# EAGLE board amc6821-breakout-v2.3 (EAGLE 9.6.2)
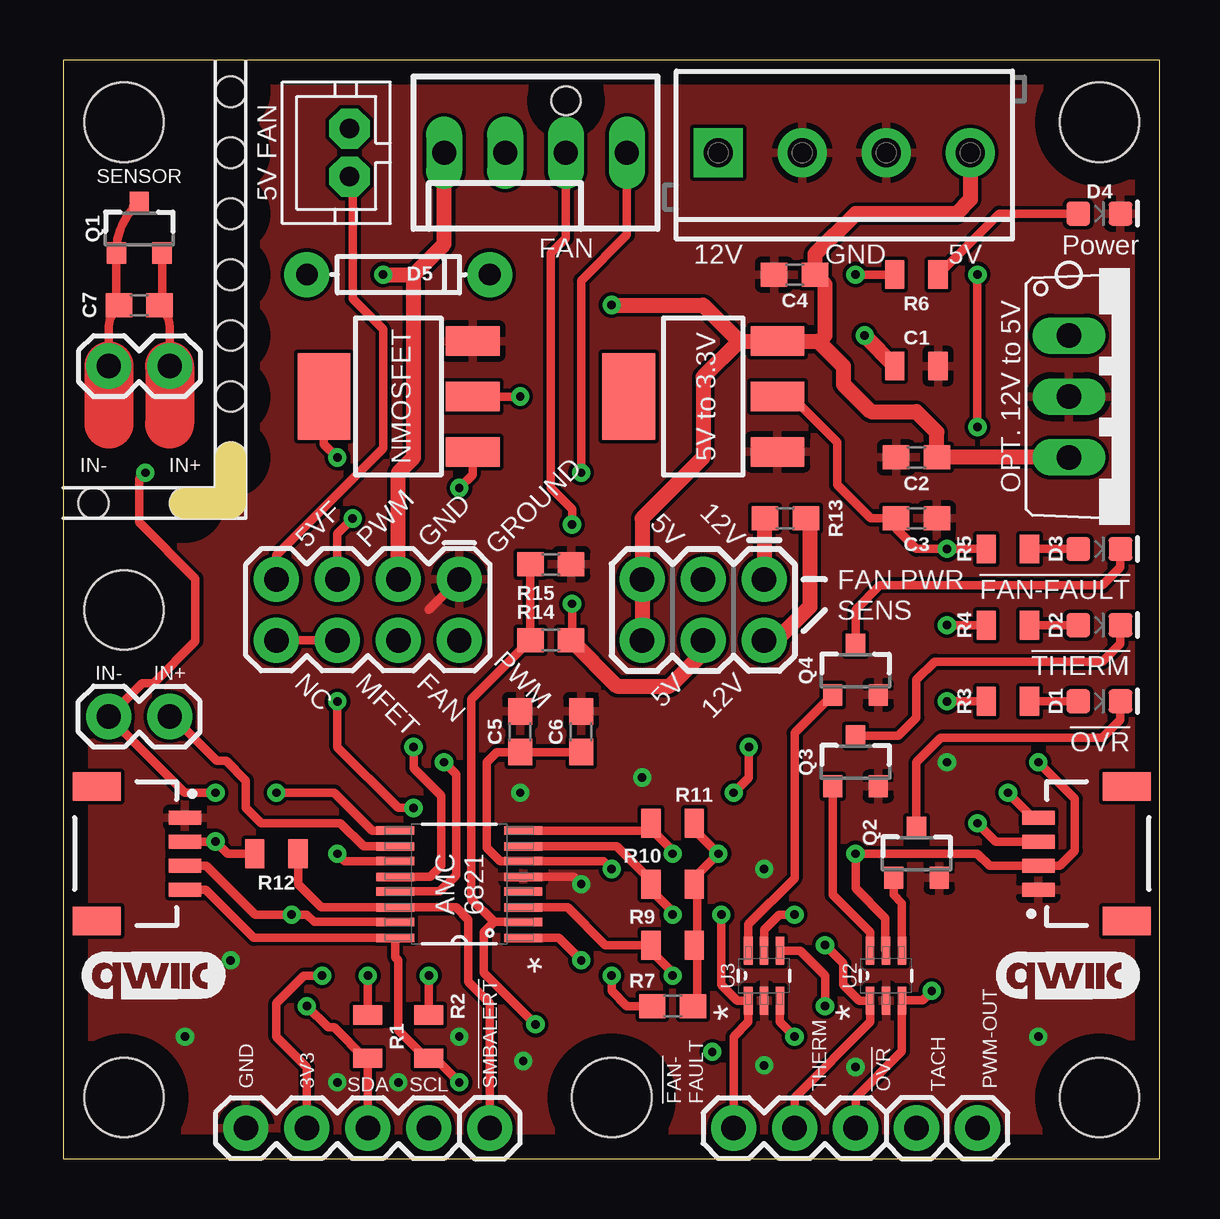
[diagram p0: board, top side]
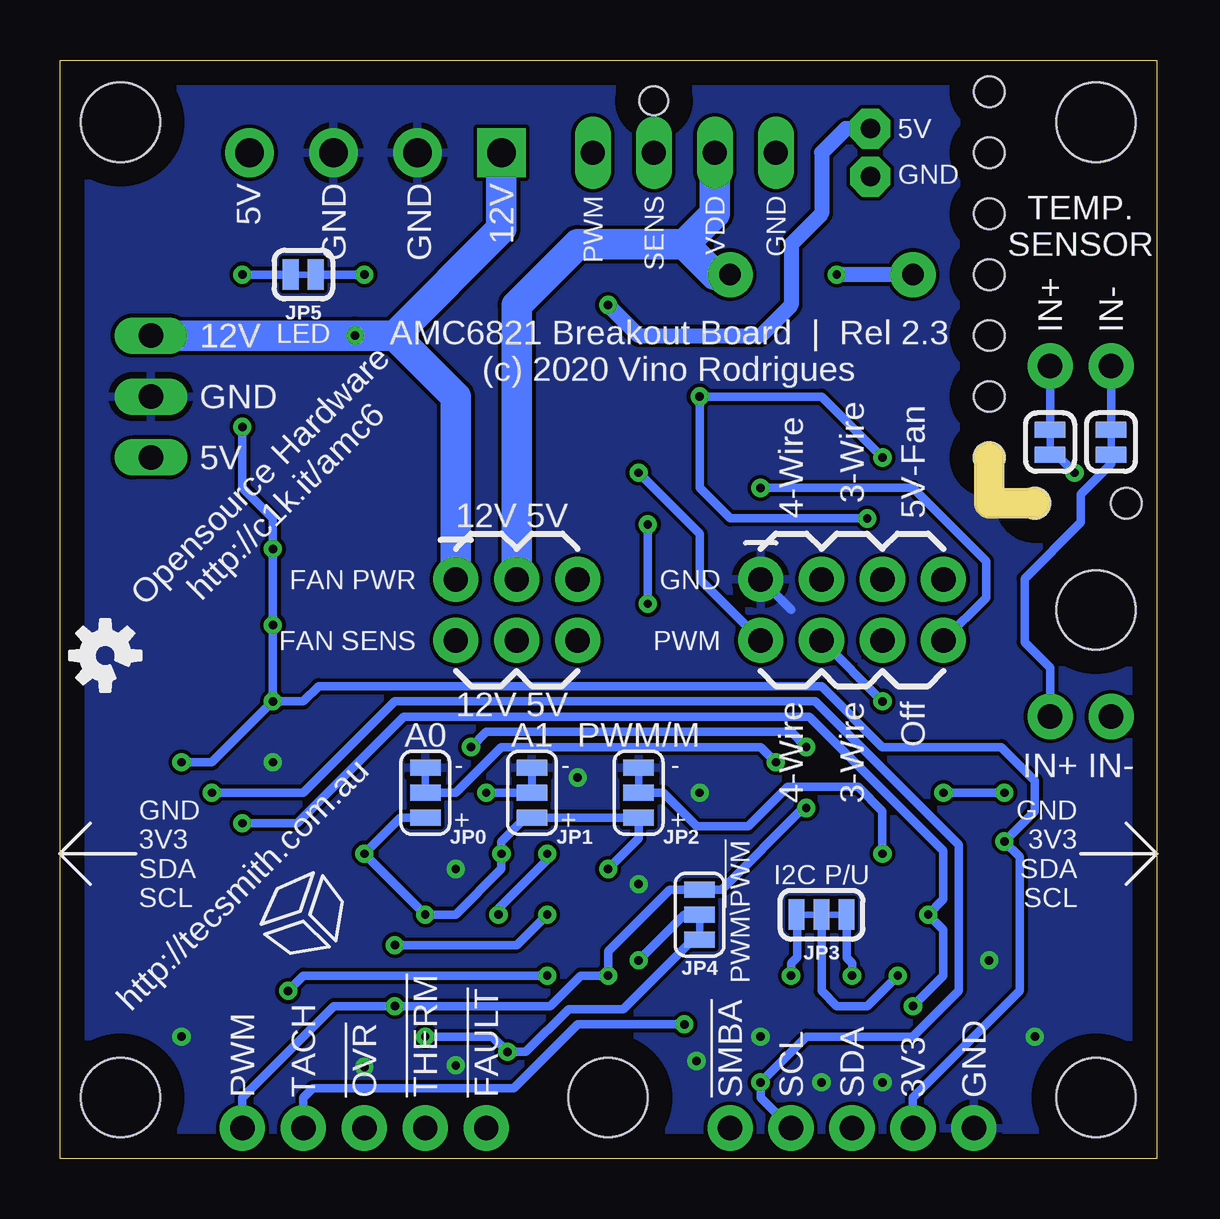
[diagram p1: board, bottom side, seen from below]

Size 45.7 x 45.77 mm. Coordinates in mm from the lower left corner, seen from the top.
Outline: 0,0 45.7,0 45.7,45.77 0,45.77 0,0
Copper layers (1*16): Top 0.035mm / dielectric 1.5mm / Bottom 0.035mm
Design rules "default": minimum track width 6mil, minimum drill 0.35mm, track to track 6mil, track to pad 6mil, pad to pad 6mil, via to via 6mil, smd to smd 6mil, copper to edge 40mil, drill to drill 6mil, minimum pad ring 10mil, minimum via ring 8mil, stop-mask expansion 4mil, vias tented up to drill 0mil, thermal gap 10mil
Holes 1.27 mm at 6.99,44.45 6.99,41.91 6.99,39.37 6.99,36.83 6.99,34.29 5.08,27.3 1.27,27.3 6.99,29.21 6.99,31.75
Milling: 2 lines

## Footprints (pad centres in the part's own frame; a part is rotated, then mirrored left to right if it is on the bottom)
0805 = smd 0.8 x 1.2: 1 -0.9,0; 2 0.9,0
0603 = smd 1.1 x 1: 1 -0.85,0; 2 0.85,0
LED-0603 = smd 1 x 1: A -0.877,0; C 0.877,0
DIODE-1N4148 = drill 0.9 pad 1.88: A -3.81,0; C 3.81,0
STAND-OFF = hole 3.302: 0,0
JST04_1MM_RA = smd 0.6 x 1.35: 1 -1.5,0; 2 -0.5,0; 3 0.5,0; 4 1.5,0 | smd 1.2 x 2: NC1 2.8,-3.675; NC2 -2.8,-3.675
1X04 = drill 1.016 pad 1.88: 1 0,0; 2 2.54,0; 3 5.08,0; 4 7.62,0
SCREWTERMINAL-3.5MM-4 = drill 1.2 pad 2.032 square: 1 0,0 | drill 1.2 pad 2.032: 2 3.5,0; 3 7,0; 4 10.5,0
MOLEX_47053-1000 = drill 1 long: 1:GND 3.81,0; 2:+12VDC 1.27,0; 3:TACH -1.27,0; 4:PWM -3.81,0 | hole 1.2: -1.27,-2.159
JST-PH2 = drill 0.813 pad 1.676 octagon: 1 1,0; 2 -1,0
1X02 = drill 1.016 pad 1.88: 1 0,0; 2 2.54,0
1X03 = drill 1.016 pad 1.88: 1 0,0; 2 2.54,0; 3 5.08,0
1X01 = drill 1.016 pad 1.88: 1 0,0
SMT-JUMPER_3_1-NC_TRACE_SILK = smd 0.66 x 1.27: 1 -1.041,0; 2 0,0; 3 1.041,0
SMT-JUMPER_3_2-NC_TRACE_SILK = smd 0.66 x 1.27: 1 -1.041,0; 2 0,0; 3 1.041,0
SMT-JUMPER_2_NC_TRACE_SILK = smd 0.66 x 1.27: 1 -0.521,0; 2 0.521,0
2X4 = drill 1.016 pad 1.88: 1 -3.81,-1.27; 2 -3.81,1.27; 3 -1.27,-1.27; 4 -1.27,1.27; 5 1.27,-1.27; 6 1.27,1.27; 7 3.81,-1.27; 8 3.81,1.27
2X3-NS = drill 1.016 pad 1.88: 1 -2.54,-1.27; 2 -2.54,1.27; 3 0,-1.27; 4 0,1.27; 5 2.54,-1.27; 6 2.54,1.27
SOT23-3 = smd 0.8 x 0.9: 1 -0.95,-1; 2 0.95,-1; 3 0,1.1
SOT223 = smd 1.219 x 2.235: D 0,-3.099; G -2.311,-3.099; S 2.311,-3.099 | smd 3.6 x 2.2: D2 0,3.099
QSOP-16N = smd 1.6 x 0.356: 1 -2.667,2.235; 2 -2.667,1.575; 3 -2.667,0.965; 4 -2.667,0.305; 5 -2.667,-0.305; 6 -2.667,-0.965; 7 -2.667,-1.575; 8 -2.667,-2.235; 9 2.667,-2.235; 10 2.667,-1.575; 11 2.667,-0.965; 12 2.667,-0.305; 13 2.667,0.305; 14 2.667,0.965; 15 2.667,1.575; 16 2.667,2.235
SOT65P210X110-6N = smd 1.168 x 0.356: 1 -1.041,0.66; 2 -1.041,0; 3 -1.041,-0.66; 4 1.041,-0.66; 5 1.041,0; 6 1.041,0.66
SOT223' = smd 1.219 x 2.235: 1 -2.311,-3.099; 2 0,-3.099; 3 2.311,-3.099 | smd 3.6 x 2.2: 4 0,3.099
TO220V = drill 1.016 long: 1 -2.54,-2.54; 2 0,-2.54; 3 2.54,-2.54

## Placement (x,y rotation side)
C1  0.33µF  [0805]  35.56,33.02 0 top
C2  0.1uF  [0603]  35.56,29.21 180 top
C3  10uF  [0603]  35.56,26.67 0 top
C4  10uF  [0603]  30.48,36.83 180 top
C5  10uF  [0603]  19.05,17.78 90 top
C6  0.1uF  [0603]  21.59,17.78 90 top
C7  1nF  [0603]  3.17,35.56 180 top
D1  RED  [LED-0603]  43.18,19.05 0 top
D2  RED  [LED-0603]  43.18,22.23 0 top
D3  RED  [LED-0603]  43.18,25.4 0 top
D4  GREEN  [LED-0603]  43.18,39.37 0 top
D5  200mA/100V/1V  [DIODE-1N4148]  13.97,36.83 0 top
H1  STAND-OFF  [STAND-OFF]  43.18,2.54 0 top
H2  STAND-OFF  [STAND-OFF]  43.18,43.18 0 top
H3  STAND-OFF  [STAND-OFF]  2.54,43.18 0 top
H4  STAND-OFF  [STAND-OFF]  2.54,2.54 0 top
H5  STAND-OFF  [STAND-OFF]  22.86,2.54 0 top
H6  STAND-OFF  [STAND-OFF]  2.54,22.86 0 top
J1  QWIIC_RIGHT_ANGLE  [JST04_1MM_RA]  40.64,12.7 90 top
J2  QWIIC_RIGHT_ANGLE  [JST04_1MM_RA]  5.08,12.7 270 top
J3  [1X04]  7.62,1.27 0 top
J4  [SCREWTERMINAL-3.5MM-4]  27.3,41.91 0 top
J5  KK-254-4KK-254  [MOLEX_47053-1000]  19.68,41.91 180 top
J6  FAN No2  [JST-PH2]  11.94,41.91 90 top
J9  [1X02]  1.91,33.02 0 top
J10  455-1750-1-ND  [1X03]  27.94,1.27 0 top
J11  [1X01]  17.78,1.27 0 top
J12  [1X01]  38.1,1.27 0 top
J13  [1X01]  35.56,1.27 0 top
J14  [1X02]  4.45,18.41 180 top
JP0  JUMPER-SMT_3_1-NC_TRACE_SILK  [SMT-JUMPER_3_1-NC_TRACE_SILK]  30.48,15.24 90 bottom
JP1  JUMPER-SMT_3_1-NC_TRACE_SILK  [SMT-JUMPER_3_1-NC_TRACE_SILK]  26.04,15.24 90 bottom
JP2  JUMPER-SMT_3_1-NC_TRACE_SILK  [SMT-JUMPER_3_1-NC_TRACE_SILK]  21.59,15.24 90 bottom
JP3  JUMPER-SMT_3_2-NC_TRACE_SILK  [SMT-JUMPER_3_2-NC_TRACE_SILK]  13.97,10.16 0 bottom
JP4  JUMPER-SMT_3_1-NC_TRACE_SILK  [SMT-JUMPER_3_1-NC_TRACE_SILK]  19.05,10.16 270 bottom
JP5  JUMPER-SMT_2_NC_TRACE_SILK  [SMT-JUMPER_2_NC_TRACE_SILK]  35.56,36.83 180 bottom
JP6  JUMPER-SMT_2_NC_TRACE_SILK  [SMT-JUMPER_2_NC_TRACE_SILK]  1.91,29.84 90 bottom
JP7  JUMPER-SMT_2_NC_TRACE_SILK  [SMT-JUMPER_2_NC_TRACE_SILK]  4.45,29.84 90 bottom
JP8  [2X4]  12.7,22.86 180 top
JP9  [2X3-NS]  26.67,22.86 180 top
LOGO1  OSHW-LOGOS  [OSHW-LOGO-S]  43.81,20.95 45 bottom
LOGO2  QWIIC_LOGO_6MM  [QWIIC_6MM]  3.81,7.62 0 top
LOGO3  QWIIC_LOGO_6MM  [QWIIC_6MM]  41.91,7.62 0 top
Q1  2N3904  [SOT23-3]  3.17,38.73 0 top
Q2  2N7002  [SOT23-3]  35.56,12.7 0 top
Q3  [SOT23-3]  33.02,16.51 0 top
Q4  [SOT23-3]  33.02,20.32 0 top
Q5  NDT3055L  [SOT223]  13.97,31.75 90 top
R1  4.7K  [0805]  12.7,5.08 270 top
R2  4.7K  [0805]  15.24,5.08 270 top
R3  1K  [0805]  39.37,19.05 180 top
R4  1K  [0805]  39.37,22.23 180 top
R5  1K  [0805]  39.37,25.4 0 top
R6  1K  [0805]  35.56,36.83 180 top
R7  2.2k  [0603]  25.4,6.35 0 top
R9  4.7K  [0805]  25.4,8.89 0 top
R10  4.7K  [0805]  25.4,11.43 0 top
R11  4.7K  [0805]  25.4,13.97 0 top
R12  4.7K  [0805]  8.89,12.7 180 top
R13  10k  [0603]  30.1,26.67 0 top
R14  10k  [0603]  20.32,21.59 0 top
R15  4.7k  [0603]  20.32,24.77 180 top
U1  AMC6821-Q1QSOP-16N  [QSOP-16N]  16.51,11.43 180 top
U2  SN74LVC2G14DCKR  [SOT65P210X110-6N]  34.29,7.62 90 top
U3  SN74LVC2G14DCKR  [SOT65P210X110-6N]  29.21,7.62 90 top
U4  LD1117-33  [SOT223']  26.67,31.75 90 top
U5  7805TV  [TO220V]  44.45,31.75 270 top
U$1  TECSMITH-LOGO  [TECSMITH-LOGO]  35.56,10.16 45 bottom

## Library data of the parts
C1 = SparkFun-Capacitors; PROD_ID: CAP-08469
C2 C6 = SparkFun-Capacitors; PROD_ID: CAP-08604
C3-C5 = SparkFun-Capacitors; PROD_ID: CAP-11015
C7 = SparkFun-Capacitors; PROD_ID: CAP-07886
D1-D3 = SparkFun-LED; PROD_ID: DIO-00819
D4 = SparkFun-LED; PROD_ID: DIO-00821
D5 = SparkFun-DiscreteSemi; PROD_ID: DIO-08378
H1-H6 = SparkFun-Hardware
J1 J2 = SparkFun-Connectors; PROD_ID: CONN-13694
J3 J9 J11-J14 JP8 JP9 = SparkFun-Connectors
J4 = SparkFun-Connectors; PROD_ID: CONN-14485
J5 J6 Q5 U1 U$1 = VinoRodrigues_Custom_Eagle
J10 = SparkFun-Connectors; PROD_ID: XXX-00000
JP0 JP1-JP7 = SparkFun-Jumpers
LOGO1-LOGO3 = SparkFun-Aesthetics
Q1 = SparkFun-DiscreteSemi; PROD_ID: TRANS-09116
Q2-Q4 = VinoRodrigues_Custom_Eagle; PROD_ID: TRANS-00830
R1-R6 R9-R12 = SparkFun-Resistors
R7 = SparkFun-Resistors; PROD_ID: RES-08306
R13 R14 = SparkFun-Resistors; PROD_ID: RES-00824
R15 = SparkFun-Resistors; PROD_ID: RES-07857
U2 U3 = VinoRodrigues_Custom_Eagle; MPN: SN74LVC2G14DCKR; OC_FARNELL: 1470885; OC_NEWARK: 76C4204; PACKAGE: SOT-23-6; SUPPLIER: Texas Instruments
U4 = SparkFun-IC-Power; PROD_ID: VREG-13917
U5 = linear

## Nets
3V3: C3.1 C5.1 C6.1 J1.2 J2.2 J3.2 JP0.1 JP1.1 JP2.1 JP3.2 JP5.2 R3.2 R4.2 R5.1 R7.2 R9.2 R10.2 R11.2 R12.2 U1.6 U2.5 U3.5 U4.2
5V: C2.1 C4.1 J4.4 J6.1 JP9.5 JP9.6 U4.3 U5.3
12V: C1.1 J4.1 JP9.1 R13.1 U5.1
!FAN-FAULT: J10.1 R11.1 U1.8 U3.1
!OVR: J10.3 R9.1 U1.3 U2.3
!PWM-OUT: JP4.3 U3.3
!SMBALERT: J11.1 R12.1 U1.14
!THERM: J10.2 R10.1 U1.7 U2.1
FAN-FAULT: Q4.1 U3.6
FAN-GND: D5.A J5.1:GND JP8.3
GND: C1.2 C2.2 C3.2 C4.2 C5.2 C6.2 D4.C J1.1 J2.1 J3.1 J4.2 J4.3 JP0.3 JP1.3 JP2.3 JP8.1 Q2.2 Q3.2 Q4.2 Q5.S R15.1 U1.5 U2.2 U3.2 U4.1 U5.2
GND-5V: J6.2 JP8.7
GND-PWM: JP8.5 Q5.D Q5.D2
IN+: J14.1 JP6.1 U1.10
IN-: J14.2 JP7.1 U1.9
N$1: JP0.2 U1.13
N$2: C7.2 J9.1 JP6.2 Q1.1 Q1.3
N$3: JP3.3 R1.1
N$4: JP3.1 R2.1
N$5: JP2.2 U1.11
N$6: JP1.2 U1.12
N$7: C7.1 J9.2 JP7.2 Q1.2
N$8: D4.A R6.1
N$9: D3.A R5.2
N$10: D3.C Q4.3
N$11: D1.A R3.1
N$12: JP5.1 R6.2
N$14: D1.C Q2.3
N$15: D2.C Q3.3
N$16: D2.A R4.1
N$17: J5.3:TACH JP9.4 R14.2
N$18: JP9.2 R13.2
OVR: Q2.1 U2.4
PWM: JP4.2 U1.1
PWM-FAN: J5.4:PWM JP8.2
PWM-MF: JP8.6 JP8.8 Q5.G
PWM-OUT: J12.1 JP4.1 JP8.4 R7.1 U3.4
SCL: J1.4 J2.4 J3.4 R2.2 U1.16
SDA: J1.3 J2.3 J3.3 R1.2 U1.15
TACH: J13.1 R14.1 R15.2 U1.2
THERM: Q3.1 U2.6
VDD: D5.C J5.2:+12VDC JP9.3

## Tracks (layer width: path | path; a pad name or v marks a point on that pad's centre or on a via)
3V3  (via drill 0.35)
  Top 0.356: U4.2 30.35,31.75 32.26,29.84 32.26,28.07 33.66,26.67 C3.1 34.71,26.25 35.56,25.4 v36.83,25.4 R5.1 | J2.2 v6.34,13.2 v6.35,13.21 6.86,12.7 R12.2 | C6.1 C5.1 18.07,16.93 17.65,16.51 17.65,12.95 18.21,12.39 U1.6 22.53,12.39 v22.86,12.06 | R4.2 v36.83,22.23 | v36.83,19.05 R3.2 | v40.64,16.51 42.16,14.99 42.16,12.83 41.54,12.2 J1.2 38.61,12.19 38.1,12.7 v33.02,12.7 33.02,11.26 34.27,10.02 34.27,8.69 U2.5 | U3.5 29.21,9.53 29.84,10.16 v30.48,10.16 | v38.1,36.83 v38.1,30.48 | J3.2 10.16,3.81 8.89,5.08 8.89,6.48 10.03,7.62 v10.79,7.62 | R11.2 26.3,13.71 v27.3,12.7 26.3,11.7 R10.2 26.43,11.3 26.43,9.02 R9.2 26.43,8.76 26.43,6.53 R7.2
  Bottom 0.356: v36.83,19.05 v36.83,22.23 v36.83,25.4 36.83,26.67 38.1,27.94 v38.1,30.48 | v40.64,16.51 39.37,16.51 v36.83,19.05 | JP5.2 v38.1,36.83 | J3.2 10.16,2.54 5.71,6.99 5.71,12.57 v6.35,13.21 5.08,14.48 5.08,15.75 6.48,17.14 11.43,17.14 13.97,19.68 34.92,19.68 35.56,19.05 v36.83,19.05 | JP3.2 13.97,6.99 13.34,6.35 12.06,6.35 v10.79,7.62 | v22.86,12.06 21.59,13.34 JP2.1 JP1.1 26.31,14.2 27.3,13.21 v27.3,12.7 27.3,12.06 29.21,10.16 v30.48,10.16 v33.02,12.7 31.52,14.2 JP0.1
5V  (via drill 0.35)
  Top 0.635: J4.4 37.8,39.96 37.21,39.37 33.02,39.37 31.33,37.68 C4.1 31.75,36.41 31.75,34.29 31.5,34.04 | U5.3 C2.1 36.41,30.27 35.56,31.11 33.66,31.11 32.51,32.26 32.51,33.02 31.5,34.04 | 28.17,34.06 U4.3 31.47,34.06 31.5,34.04 | v22.86,35.56 26.67,35.56 28.17,34.06 | 28.17,34.06 26.67,32.56 26.67,29.21 24.13,26.67 JP9.5 JP9.6
  Bottom 0.635: J6.1 12.97,42.91 13.97,41.91 13.97,39.37 15.24,38.1 15.24,35.56 16.51,34.29 21.59,34.29 v22.86,35.56
12V  (via drill 0.35)
  Top 0.635: C1.1 v33.4,34.28 v33.4,34.29 | R13.1 29.21,26.63 JP9.1
  Bottom 1.27: J4.1 27.3,38.73 31.75,34.29 | U5.1 v33.4,34.29 31.75,34.29 | 31.75,34.29 29.21,31.75 JP9.1
!FAN-FAULT  (via drill 0.35)
  Top 0.356: U1.8 24.2,13.66 R11.1 24.5,13.73 25.4,12.83 v25.4,12.7 | J10.1 27.94,5.08 28.55,5.69 U3.1 28.09,6.58 27.43,7.24 v27.43,10.16
  Bottom 0.356: v27.43,10.16 27.43,10.41 25.4,12.45 v25.4,12.7
!OVR  (via drill 0.35)
  Top 0.356: J10.3 33.02,2.54 34.95,4.47 U2.3 34.98,6.6 35.81,6.6 v36.2,6.99 | v25.4,7.62 25.4,7.74 24.5,8.64 R9.1 22.59,8.89 21.02,10.46 U1.3
  Bottom 0.356: v25.4,7.62 35.56,7.62 v36.2,6.99
!PWM-OUT  (via drill 0.35)
  Top 0.356: U3.3 29.87,5.69 v30.48,5.08
  Bottom 0.356: v30.48,5.08 27.69,5.08 v27.05,4.45 26.29,4.45 24.51,6.22 22.23,6.22 19.33,9.12 JP4.3
!SMBALERT
  Top 0.356: R12.1 9.79,11.43 10.76,10.46 U1.14 16.38,10.46 16.89,9.96 16.89,7.37 17.78,6.48 J11.1
!THERM  (via drill 0.35)
  Top 0.356: J10.2 30.48,2.54 33.63,5.69 U2.1 33.17,6.58 32.51,7.24 32.51,8.13 v31.75,8.89 | U1.7 23.06,13.01 24.5,11.57 R10.1 24.5,11.19 25.4,10.29 v25.4,10.16
  Bottom 0.356: v31.75,8.89 26.67,8.89 v25.4,10.16
FAN-FAULT
  Top 0.356: U3.6 28.55,9.75 30.48,11.68 30.48,17.73 Q4.1
FAN-GND  (via drill 0.35)
  Top 0.635: 14.61,36.83 14.61,29.21 13.97,28.57 JP8.3 | 14.61,36.83 15.88,38.1 J5.1:GND | v13.34,36.83 14.61,36.83
  Bottom 0.635: D5.A v13.34,36.83
GND  (via drill 0.35)
  Top 0.356: U1.5 21.29,11.73 v21.59,11.43 | JP8.1 15.24,22.86
  Bottom 0.356: JP8.1 15.24,22.86
  other vias: 29.21,3.88 33.02,3.81 36.83,16.51 24.13,15.88 19.18,4.06 16.51,5.08 11.43,3.17 5.08,5.08 6.99,8.26 19.05,15.24 13.97,3.17 29.21,12.06 40.64,5.08
  pour Bottom: 0,0 45.72,0 45.72,45.72 7.62,45.72 7.62,26.67 0,26.67
  pour Top: 0,0 0,26.67 7.62,26.67 7.62,45.72 45.72,45.72 45.72,0
GND-5V
  Top 0.356: J6.2 12.06,40.78 12.06,35.81 13.34,34.54 13.34,29.59 8.89,25.15 JP8.7
GND-PWM  (via drill 0.35)
  Top 0.356: v12.06,26.67 11.43,26.04 JP8.5 | v19.05,31.75 Q5.D | v11.43,29.21 10.87,29.77 Q5.D2
  Bottom 0.356: v12.06,26.67 17.78,26.67 19.05,27.94 v19.05,31.75 13.97,31.75 v11.43,29.21
IN+
  Top 0.356: U1.10 12.52,13.01 11.56,13.97 8.26,13.97 7.62,14.61 7.62,15.75 6.79,16.57 6.41,16.57 4.57,18.41 J14.1
  Bottom 0.356: J14.1 4.45,20.45 5.51,21.51 5.51,24.16 3.17,26.5 3.17,27.67 1.91,28.94 JP6.1
IN-  (via drill 0.35)
  Top 0.356: v3.43,28.57 3.17,28.32 3.17,26.5 5.51,24.16 5.51,21.55 3.77,19.81 3.3,19.81 J14.2 5.08,15.24 v6.35,15.24 | U1.9 12.88,13.66 11.3,15.24 v8.89,15.24
  Bottom 0.356: v3.43,28.57 4.18,29.32 | v8.89,15.24 v6.35,15.24
  Bottom 0.508: 4.18,29.32 JP7.1
N$1  (via drill 0.35)
  Top 0.356: U1.13 15.7,11.12 16.38,11.81 16.38,16 v15.88,16.51
  Bottom 0.356: v15.88,16.51 16.51,17.14 27.3,17.14 29.21,15.24 JP0.2
N$2
  Top 0.356: 2.97,39.63 arc45 2.23,37.83 | Q1.1 2.23,35.8 | C7.2 arc45 1.91,34.55 J9.1
  Top 0.508: Q1.3 2.97,39.63 | 2.23,37.83 Q1.1 | 2.23,35.8 arc45 C7.2
  Top 2.032: J9.1 1.91,30.61
  Bottom 0.356: J9.1 JP6.2
N$3  (via drill 0.35)
  Top 0.356: R1.1 v12.7,7.62
  Bottom 0.356: v12.7,7.62 12.7,8.13 12.93,8.36 JP3.3
N$4  (via drill 0.35)
  Top 0.356: R2.1 v15.24,7.62
  Bottom 0.356: v15.24,7.62 15.24,8.13 14.99,8.38 14.99,10.16 JP3.1
N$5  (via drill 0.35)
  Top 0.356: U1.11 11.73,12.39 v11.43,12.7
  Bottom 0.356: v11.43,12.7 11.43,14.48 12.45,15.49 15.37,15.49 17.02,13.84 19.18,13.84 20.57,15.24 JP2.2
N$6  (via drill 0.35)
  Top 0.356: U1.12 15.29,11.73 15.75,12.19 15.75,15.11 14.61,16.26 v14.61,17.14 | v28.57,17.14 28.57,15.88 v27.94,15.24
  Bottom 0.356: v27.94,15.24 JP1.2 | v28.57,17.14 27.94,17.78 15.24,17.78 v14.61,17.14
N$7
  Top 0.356: Q1.2 4.12,35.8 | C7.1 arc-45 4.45,34.55 J9.2
  Top 0.508: 4.12,35.8 arc-45 C7.1
  Top 2.032: J9.2 4.45,30.61
  Bottom 0.356: J9.2 JP7.2
N$8
  Top 0.356: R6.1 39,39.37 D4.A
N$9
  Top 0.356: D3.A R5.2
N$10
  Top 0.356: D3.C 44.06,24.63 43.31,23.88 34.04,23.88 33.02,22.86 Q4.3
N$11
  Top 0.356: R3.1 D1.A
N$12  (via drill 0.35)
  Top 0.356: v33.02,36.83 R6.2
  Bottom 0.356: JP5.1 v33.02,36.83
N$14
  Top 0.356: D1.C 44.06,18.28 43.31,17.53 36.58,17.53 35.56,16.51 Q2.3
N$15
  Top 0.356: D2.C 44.06,21.45 43.31,20.7 36.32,20.7 35.56,19.94 35.56,18.37 34.8,17.61 Q3.3
N$16
  Top 0.356: D2.A R4.1
N$17  (via drill 0.35)
  Top 0.356: J5.3:TACH 20.95,38.35 20.32,37.72 20.32,27.94 21.21,27.05 v21.21,26.42 | v21.21,23.11 21.21,21.63 R14.2
  Top 0.635: R14.2 23.07,19.68 25.27,19.68 26.67,21.08 JP9.4
  Bottom 0.356: v21.21,23.11 v21.21,26.42
N$18
  Top 0.635: R13.2 31.11,26.5 31.11,22.99 29.72,21.59 JP9.2
OVR
  Top 0.356: U2.4 34.95,10.64 34.61,10.98 Q2.1
PWM  (via drill 0.35)
  Top 0.356: U1.1 20.65,9.2 v21.59,8.26
  Bottom 0.356: JP4.2 19.68,10.16 v21.59,8.26
PWM-FAN  (via drill 0.35)
  Top 0.356: J5.4:PWM 23.5,38.48 21.59,36.58 v21.59,28.57
  Bottom 0.356: v21.59,28.57 19.05,26.04 19.05,24.13 JP8.2
PWM-MF  (via drill 0.35)
  Top 0.356: Q5.G 17.07,28.5 v16.51,27.94 | JP8.6 JP8.8
  Bottom 0.356: v16.51,27.94 10.16,27.94 7.11,24.89 7.11,23.37 JP8.8
PWM-OUT  (via drill 0.35)
  Top 0.356: U3.4 30.71,8.66 31.75,7.62 v31.75,6.35 | v14.61,14.61 13.97,14.61 11.43,17.14 v11.43,19.05 | R7.1 23.5,6.35 22.86,6.99 v22.86,7.62
  Bottom 0.356: JP8.4 v11.43,19.05 | v14.61,14.61 14.73,14.61 18.14,11.2 JP4.1 20.3,11.2 22.86,8.64 v22.86,7.62 24,7.62 25.27,6.35 v31.75,6.35 34.29,6.35 38.1,2.54 J12.1
SCL  (via drill 0.35)
  Top 0.356: J2.4 5.95,11.2 7.95,9.2 U1.16 13.84,8.38 13.97,8.26 13.97,5.33 15.12,4.18 R2.2 15.51,4.18 v16.51,3.17 | J1.4 40.41,14.2 v39.37,15.24
  Bottom 0.356: v39.37,15.24 35.56,15.24 31.75,19.05 14.22,19.05 8.26,13.08 8.26,6.99 10.16,5.08 14.61,5.08 v16.51,3.17 16.51,2.54 J3.4
SDA  (via drill 0.35)
  Top 0.356: J2.3 5.96,12.2 8,10.16 v9.53,10.16 10.16,10.16 10.46,9.86 U1.15 | J3.3 R1.2 12.57,4.18 11.29,5.46 11.05,5.46 v10.16,6.35 | J1.3 38.87,13.2 v38.1,13.97
  Bottom 0.356: v38.1,13.97 35.81,13.97 31.37,18.41 14.48,18.41 8.89,12.83 8.89,10.79 v9.53,10.16 8.89,9.53 8.89,7.62 v10.16,6.35
TACH  (via drill 0.35)
  Top 0.356: U1.2 17.96,9.86 | 17.96,9.86 17.02,10.79 17.02,19.14 R14.1 R15.2 | 17.96,9.86 17.53,9.42 17.53,7.75 v19.68,5.59
  Bottom 0.356: J13.1 35.56,2.54 35.18,2.92 26.8,2.92 24.13,5.59 v19.68,5.59
THERM
  Top 0.356: U2.6 33.63,9.42 32.07,10.98 Q3.1
VDD
  Bottom 1.27: JP9.3 26.67,35.56 24.13,38.1 19.68,38.1 | J5.2:+12VDC 18.41,39.37 19.68,38.1 | D5.C 18.41,36.83 19.68,38.1

## Text on the board
tPlace: 5V FAN | FAN | NMOSFET | 5V to 3.3V | OPT. 12V to 5V | GROUND | FAN PWR | SENS | PWM | AMC / 6821
bPlace: AMC6821 Breakout Board | Rel 2.3 / (c) 2020 Vino Rodrigues | Opensource Hardware / http://c1k.it/amc6 | GND | FAN PWR | PWM | FAN SENS | http://tecsmith.com.au
tNames: SENSOR | 12V | GND | 5V | Power | IN- | IN+ | 5VF | PWM | GND | 5V | 12V | !FAN-FAULT | !THERM | IN- | IN+ | NC | MFET | FAN | 5V | 12V | !OVR | U3 | U2 | GND | 3V3 | SDA | SCL | !SMBALERT | THERM | !OVR | TACH | PWM-OUT | !FAN- / FAULT
bNames: 5V | GND | 12V | GND | GND | 5V | GND | VDD | SENS | PWM | TEMP. / SENSOR | LED | IN- | IN+ | 12V | GND | 5V | 5V-Fan | 3-Wire | 4-Wire | 5V | 12V | Off | 3-Wire | 4-Wire | 5V | 12V | IN- | IN+ | PWM/M | A1 | A0 | - | - | - | + | + | + | GND / 3V3 / SDA / SCL | GND / 3V3 / SDA / SCL | I2C P/U | PWM\\!PWM | GND | 3V3 | SDA | SCL | !SMBA | !FAULT | !THERM | !OVR | TACH | PWM
tValues: 5V | 12V | 5V | 12V